# EAGLE board uvswitch_pcb (EAGLE 4.11)
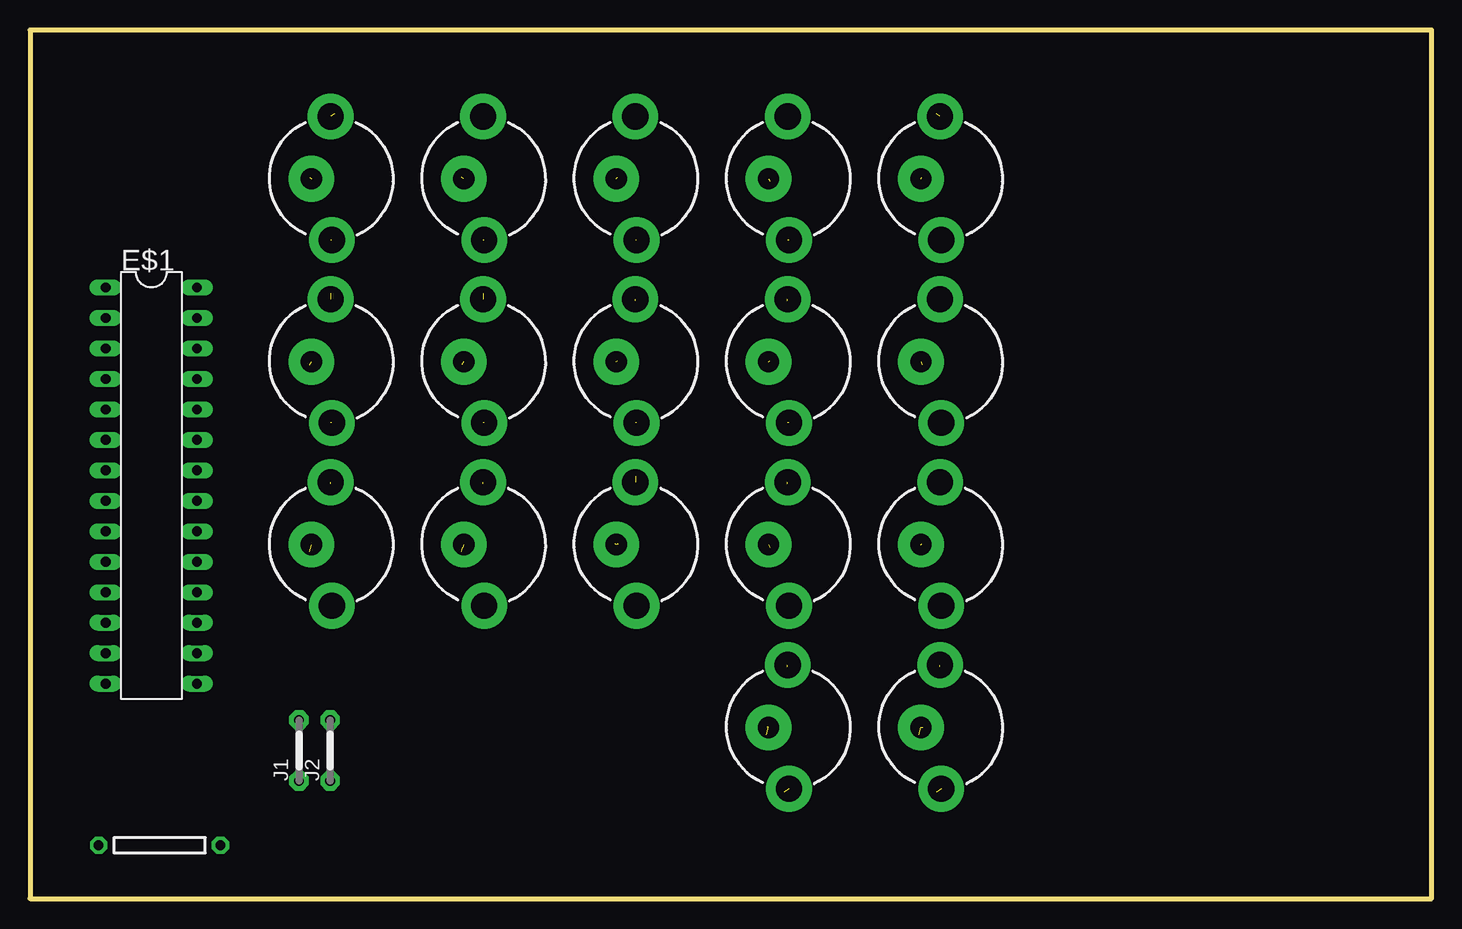
[diagram p0: board, top side]
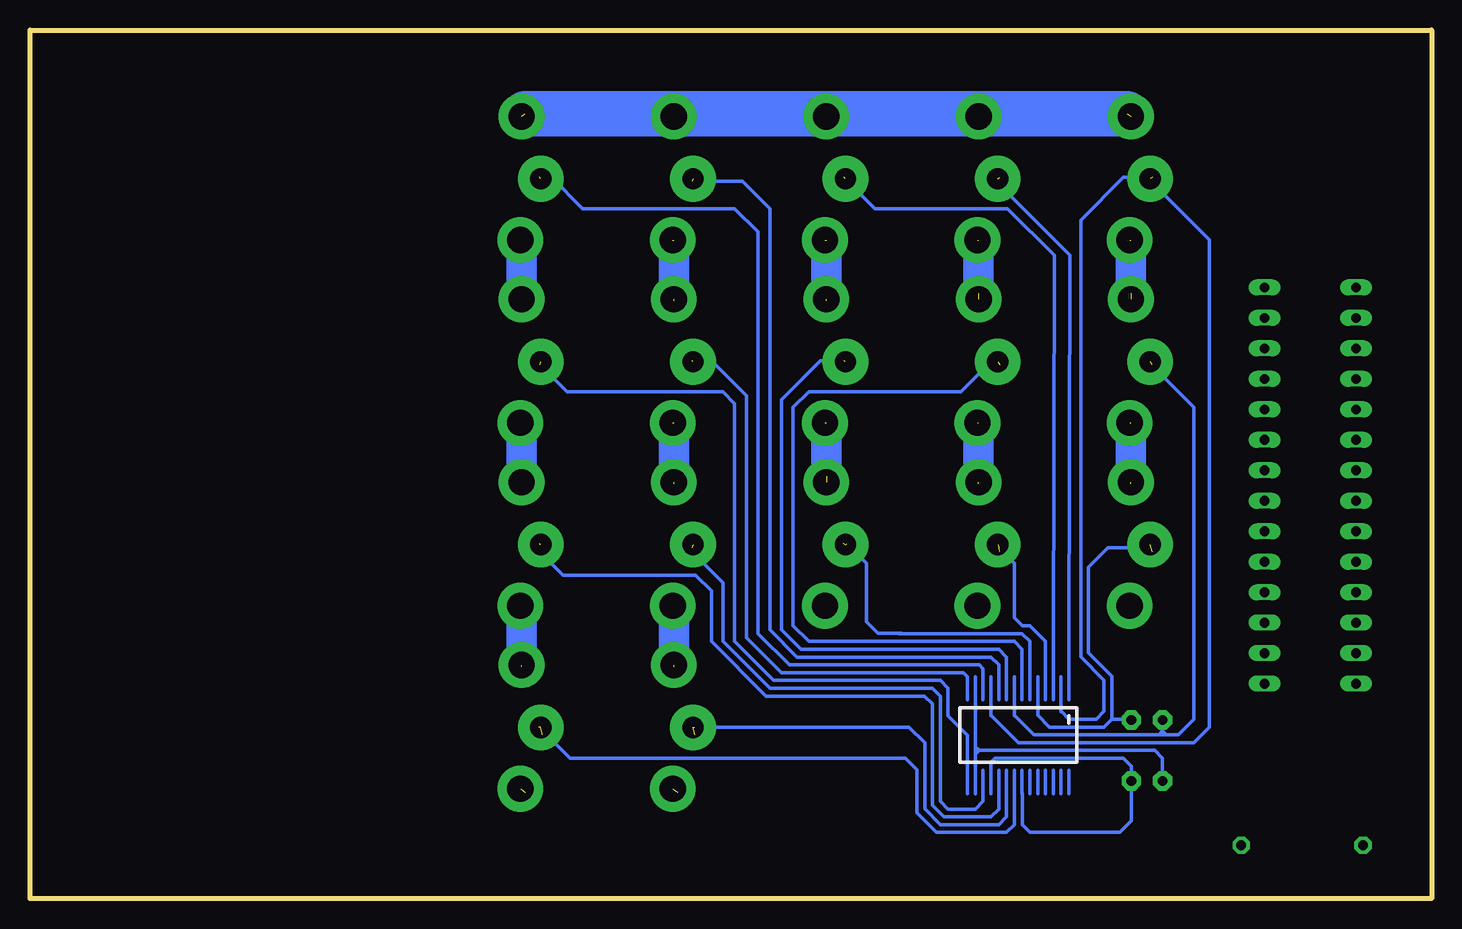
[diagram p1: board, bottom side, seen from below]

Size 116.84 x 72.39 mm. Coordinates in mm from the lower left corner, seen from the top.
Outline: 116.84,0 116.84,72.39 0,72.39 0,0 116.84,0
Copper layers (1*16): Top 0.035mm / dielectric 1.5mm / Bottom 0.035mm
Design rules "default": minimum track width 10mil, minimum drill 24mil, track to track 8mil, track to pad 8mil, pad to pad 8mil, via to via 8mil, smd to smd 8mil, copper to edge 40mil, drill to drill 8mil, minimum pad ring 10mil, minimum via ring 8mil, stop-mask expansion 4mil, vias tented up to drill 0mil, thermal gap 10mil

## Footprints (pad centres in the part's own frame; a part is rotated, then mirrored left to right if it is on the bottom)
DIL28-3 = drill 0.813 long: 1 -16.51,-3.81; 2 -13.97,-3.81; 3 -11.43,-3.81; 4 -8.89,-3.81; 5 -6.35,-3.81; 6 -3.81,-3.81; 7 -1.27,-3.81; 8 1.27,-3.81; 9 3.81,-3.81; 10 6.35,-3.81; 11 8.89,-3.81; 12 11.43,-3.81; 13 13.97,-3.81; 14 16.51,-3.81; 15 16.51,3.81; 16 13.97,3.81; 17 11.43,3.81; 18 8.89,3.81; 19 6.35,3.81; 20 3.81,3.81; 21 1.27,3.81; 22 -1.27,3.81; 23 -3.81,3.81; 24 -6.35,3.81; 25 -8.89,3.81; 26 -11.43,3.81; 27 -13.97,3.81; 28 -16.51,3.81
05 = drill 0.813 pad 1.6 octagon: 1 -2.54,0; 2 2.54,0

## Placement (x,y rotation side)
E$1  [DIL28-3]  10.12,34.42 270 top
J1  [05]  22.43,12.35 90 top
J2  [05]  25.02,12.35 90 top

## Library data of the parts
E$1 = microchip
J1 J2 = jumper

## Tracks (layer width: path | path; a pad name or v marks a point on that pad's centre or on a via)
S$1  (via drill 1.78 pad 3.81)  (3 unrouted)
  Bottom 0.305: 44.2,22.1 46.15,22.1 47.12,23.07 47.12,27.95 48.75,29.57 | 48.99,28.91 48.99,29.56
  Bottom 0.406: 49.08,29.25 49.08,29.57
  other vias: 48.87,29.51
S$2  (via drill 2.18 pad 3.81)  (2 unrouted)
  Bottom 2.54: 37.77,50.45 37.77,54.89
  other vias: 37.87,54.89 37.77,49.95
S$3  (via drill 2.18 pad 3.81)  (2 unrouted)
  Bottom 3.81: 25.4,65.41 75.56,65.41
  other vias: 25.07,65.19 75.86,65.19
S$4  (via drill 2.18 pad 3.81)
  other vias: 37.87,24.41
S$5  (via drill 2.18 pad 3.81)  (2 unrouted)
  Bottom 2.54: 37.77,34.57 37.77,39.65
  other vias: 37.87,39.65 37.77,34.71
S$6  (via drill 1.78 pad 3.81)  (2 unrouted)
  Bottom 0.305: 32.17,20.8 32.17,21.45 33.48,22.75 34.12,22.75 34.77,23.4 34.77,27.95 36.08,29.25 | 35.99,28.91 35.99,28.26
  other vias: 36.16,29.51
S$7  (via drill 2.18 pad 3.81)  (1 unrouted)
  other vias: 75.97,9.17
S$8  (via drill 2.18 pad 3.81)  (1 unrouted)
  other vias: 63.27,9.17
S$9  (via drill 2.18 pad 3.81)  (1 unrouted)
  Bottom 2.54: 63.16,19.33 63.16,24.41
  other vias: 63.16,19.47
S$10
  Bottom 0.305: 34.12,8.78 34.12,6.17 33.48,5.53 26,5.53 25.02,6.5 25.02,11.05 25.68,11.7 36.4,11.7 36.73,11.38
S$11  (via drill 2.18 pad 3.81)  (2 unrouted)
  Bottom 2.54: 50.47,49.81 50.47,54.89
  other vias: 50.56,54.89 50.47,49.95
S$12  (via drill 0.81 pad 1.42)
  other vias: 15.88,4.45
S$13  (via drill 2.18 pad 3.81)
  other vias: 50.56,24.41
S$14  (via drill 2.18 pad 3.81)  (2 unrouted)
  Bottom 2.54: 50.47,35.2 50.47,39.65
  other vias: 50.56,39.65 50.47,34.71
S$15  (via drill 2.18 pad 3.81)  (1 unrouted)
  Bottom 2.54: 75.86,19.33 75.86,24.41
  other vias: 75.86,19.47
S$16
  Bottom 2.54: 75.86,49.81 75.86,54.89
S$17  (via drill 1.78 pad 3.81)  (2 unrouted)
  Bottom 0.305: 35.42,8.78 35.42,6.83 36.08,6.17 40.95,6.17 42.25,7.47 42.25,13 43.55,14.3 61.42,14.3 | 61.4,13.67 61.4,13.02
  other vias: 61.56,14.27
S$18  (via drill 1.78 pad 3.81)  (2 unrouted)
  Bottom 0.305: 34.77,8.78 34.77,6.17 35.42,5.53 41.27,5.53 42.9,7.15 42.9,10.72 43.88,11.7 71.83,11.7 74.42,14.3 | 74.09,13.67 74.09,13.02
  other vias: 74.27,14.27
S$19  (via drill 2.18 pad 3.81)  (2 unrouted)
  Bottom 2.54: 63.16,34.57 63.16,39.65
  other vias: 63.27,39.65 63.16,34.71
S$21  (via drill 1.78 pad 3.81)  (1 unrouted)
  Bottom 0.305: 32.83,15.6 32.83,15.28 31.85,14.3 27.3,14.3 26.65,14.95 | 26.65,14.95 26.65,18.52 28.6,20.48 28.6,27.62 26.98,29.25 23.4,29.25 | 23.3,28.91 23.3,28.26 | 26.65,14.95 25.02,14.95
  other vias: 23.46,29.51
S$22  (via drill 2.18 pad 3.81)
  other vias: 63.27,24.41
S$23  (via drill 1.78 pad 3.81)  (1 unrouted)
  Bottom 0.305: 34.77,15.28 33.15,13.65 22.75,13.65 | 22.75,13.65 22.1,13.65 | 22.1,13.65 21.12,13.65 19.82,14.95 19.82,40.95 23.4,44.52 | 24.27,44.51 23.3,44.51 | 22.43,14.95 22.43,13.97 | 22.1,13.65 22.43,13.97 | 22.43,13.97 22.75,13.65
  other vias: 23.46,44.75
S$24  (via drill 1.78 pad 3.81)  (1 unrouted)
  Bottom 0.305: 74.34,60.11 73.37,60.11 70.77,57.51 58.09,57.51 56.15,55.56 56.15,22.09 53.55,19.48 37.71,19.48 37.38,19.16 37.38,16.56
  other vias: 74.27,59.99
S$25  (via drill 2.18 pad 3.81)
  other vias: 75.97,54.89
S$26  (via drill 1.78 pad 3.81)  (1 unrouted)
  Bottom 0.305: 36.73,15.28 34.45,13 19.82,13 18.52,14.3 18.52,54.92 23.73,60.12 25.68,60.12 29.25,56.55 29.25,20.15 27.3,18.2 27.3,15.6 27.95,14.95 30.23,14.95 30.88,15.6
  Bottom 0.406: 23.3,60.11 23.3,59.46
  other vias: 23.46,59.99
S$27
  Bottom 0.305: 37.7,12.35 38.02,12.35 | 37.7,12.35 38.02,12.68 | 37.7,12.35 38.02,12.03 | 37.7,12.35 23.07,12.35 22.43,11.7 22.43,9.75
S$28  (via drill 2.18 pad 3.81)
  other vias: 75.97,39.65
S$30  (via drill 0.81 pad 1.42)
  other vias: 5.71,4.45
S$31  (via drill 2.18 pad 3.81)
  other vias: 75.97,24.41
S$33  (via drill 2.18 pad 3.81)
  other vias: 75.86,49.95
S$34  (via drill 2.18 pad 3.81)
  other vias: 25.16,24.41
S$36  (via drill 2.18 pad 3.81)  (2 unrouted)
  Bottom 2.54: 25.07,34.57 25.07,39.65
  other vias: 25.16,39.65 25.07,34.71
S$38  (via drill 1.78 pad 3.81)  (1 unrouted)
  Bottom 0.305: 48.99,60.11 46.4,57.51 35.34,57.51 31.45,53.61 31.54,20.79 31.54,18.51
  other vias: 48.87,59.99
S$42  (via drill 2.18 pad 3.81)
  other vias: 75.86,34.71
S$46  (via drill 2.18 pad 3.81)
  other vias: 50.47,65.19
S$49  (via drill 1.78 pad 3.81)  (1 unrouted)
  Bottom 0.305: 35.99,59.46 30.14,53.61 30.23,20.46 30.23,18.51
  Bottom 0.406: 35.99,59.46 35.99,60.11
  other vias: 36.16,59.99
S$52  (via drill 2.18 pad 3.81)
  other vias: 37.77,65.19
S$53  (via drill 2.18 pad 3.81)
  other vias: 63.16,65.19
S$54  (via drill 2.18 pad 3.81)  (2 unrouted)
  Bottom 2.54: 63.16,49.81 63.16,54.89
  other vias: 63.27,54.89 63.16,49.95
S$58
  Bottom 2.54: 75.86,34.57 75.86,39.65
S$60
  Bottom 0.305: 32.84,15.59 32.84,18.51
S$61
  Bottom 0.305: 30.89,15.59 30.89,18.51
S$62
  Bottom 0.305: 30.23,16.56 30.23,18.51
S$63
  Bottom 0.305: 32.19,16.56 32.19,20.79
S$64
  Bottom 0.305: 31.54,16.56 31.54,18.51
S$65
  Bottom 0.305: 44.38,22.09 34.13,22.09 33.48,21.43 33.48,16.56
S$66
  Bottom 0.305: 34.78,15.26 34.78,18.51
S$67  (via drill 1.78 pad 3.81)  (1 unrouted)
  Bottom 0.305: 35.99,44.51 36.97,44.51 39.24,42.23 51.92,42.23 53.22,40.94 53.22,22.73 51.92,21.43 34.78,21.43 34.13,20.79 34.13,16.56
  other vias: 36.16,44.75
S$68  (via drill 1.78 pad 3.81)  (1 unrouted)
  Bottom 0.305: 74.34,44.51 72.07,42.23 59.07,42.23 58.09,41.26 58.09,21.43 54.84,18.18 40.96,18.18 40.31,17.54 40.31,15.26 38.69,13.63 38.69,8.76
  other vias: 74.27,44.75
S$69
  Bottom 0.305: 36.73,15.26 36.73,18.51
S$70
  Bottom 0.305: 30.89,8.76 30.89,10.71
S$71
  Bottom 0.305: 34.13,8.76 34.13,10.71
S$72
  Bottom 0.305: 34.78,8.76 34.78,10.71
S$73
  Bottom 0.305: 32.84,8.76 32.84,10.71
S$74
  Bottom 0.305: 33.48,8.76 33.48,10.71
S$75
  Bottom 0.305: 32.19,8.76 32.19,10.71
S$76
  Bottom 0.305: 31.54,8.76 31.54,10.71
S$77
  Bottom 0.305: 30.23,8.76 30.23,10.71
S$78
  Bottom 0.305: 35.44,8.76 35.44,10.71
S$79
  Bottom 0.305: 36.73,8.76 36.73,11.36
S$80
  Bottom 0.305: 38.03,8.76 38.03,18.51
S$81  (via drill 1.78 pad 3.81)  (1 unrouted)
  Bottom 0.305: 61.67,44.84 60.05,44.84 57.12,41.91 57.12,21.76 54.2,18.84 39.01,18.84 38.69,18.51 38.69,16.56
  other vias: 61.56,44.75
S$82  (via drill 1.78 pad 3.81)  (1 unrouted)
  Bottom 0.305: 61.67,59.78 57.45,59.78 55.17,57.51 55.17,22.41 52.9,20.14 36.73,20.14 36.09,19.48 36.09,16.56
  other vias: 61.56,59.99
S$83  (via drill 1.78 pad 3.81)  (1 unrouted)
  Bottom 0.305: 48.99,44.84 50.95,44.84 54.2,41.59 54.2,22.41 52.57,20.79 36.09,20.79 35.44,20.14 35.44,16.56
  other vias: 48.87,44.75
S$84  (via drill 1.78 pad 3.81)  (1 unrouted)
  Bottom 0.305: 74.34,29.56 74.34,28.91 72.39,26.96 61.34,26.96 60.05,25.66 60.05,21.43 55.49,16.89 42.26,16.89 41.61,16.23 41.61,7.79 40.63,6.81 36.73,6.81 36.09,7.46 36.09,10.71
  other vias: 74.27,29.51
S$85  (via drill 1.78 pad 3.81)  (1 unrouted)
  Bottom 0.305: 61.67,29.23 61.67,28.91 59.07,26.31 59.07,21.43 55.17,17.54 41.61,17.54 40.96,16.89 40.96,8.11 40.31,7.46 38.03,7.46 37.38,8.11 37.38,10.71
  other vias: 61.56,29.51
S$148  (via drill 2.18 pad 3.81)  (2 unrouted)
  Bottom 2.54: 25.07,50.45 25.07,54.89
  other vias: 25.16,54.89 25.07,49.95